# Altium PCB double_amp.PcbDoc
Units mm, origin at the board's own origin, x right, y up, seen from the top; angles counter-clockwise.
Board outline 25 x 21 mm, 2 copper layers (Top Layer, Bottom Layer), stack 0.581 mm thick; 17 components, 11 nets, 135 pads, 86 vias.
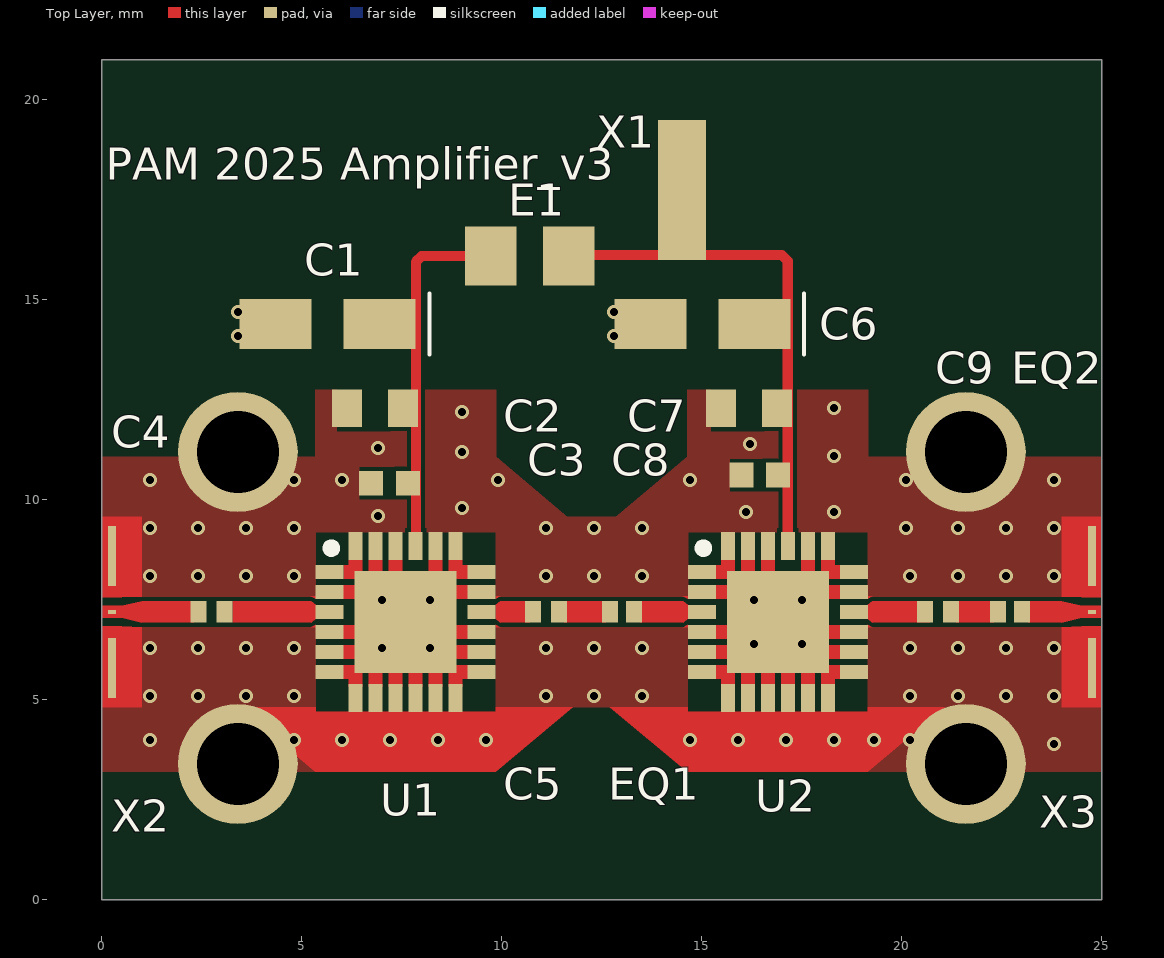
[diagram p0: Top Layer view]
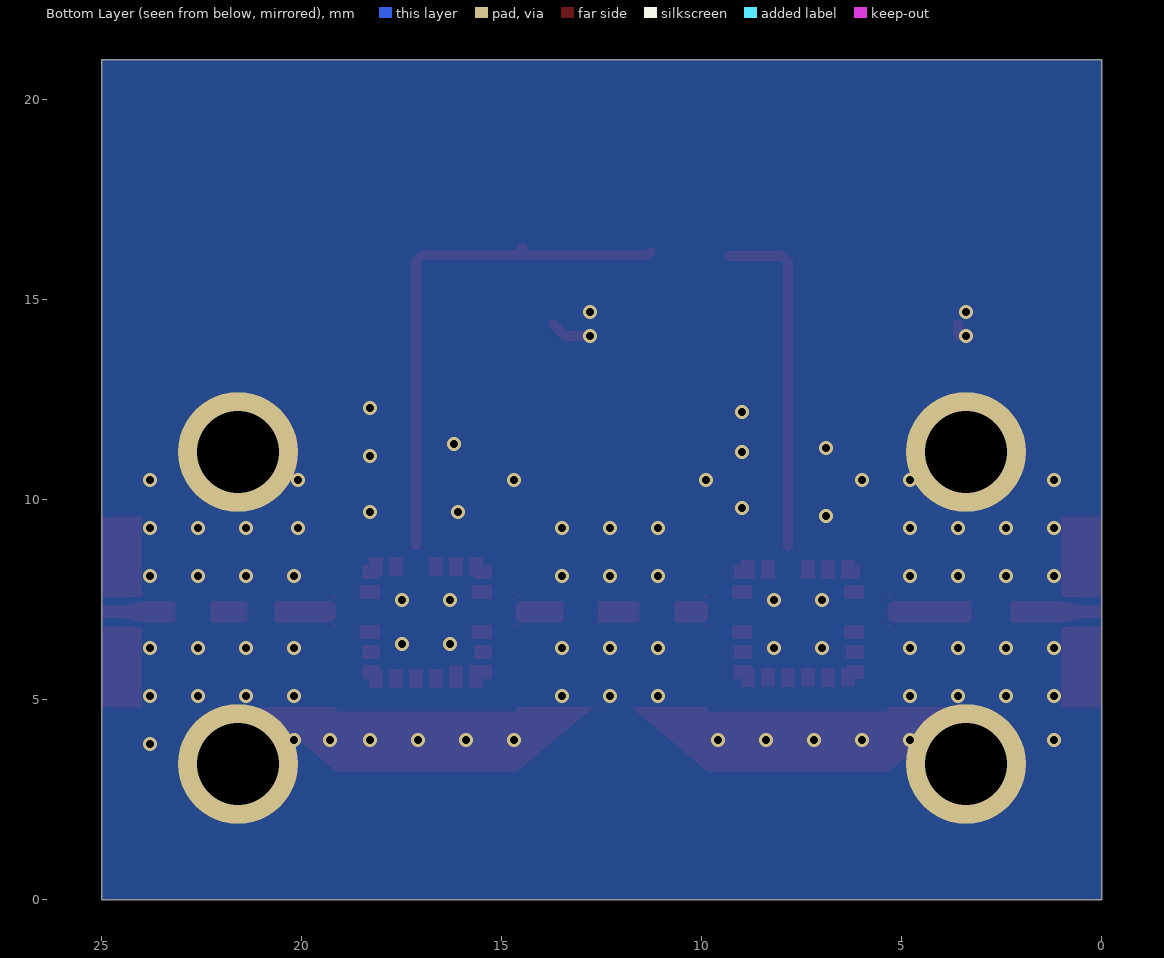
[diagram p1: Bottom Layer view, seen from below]
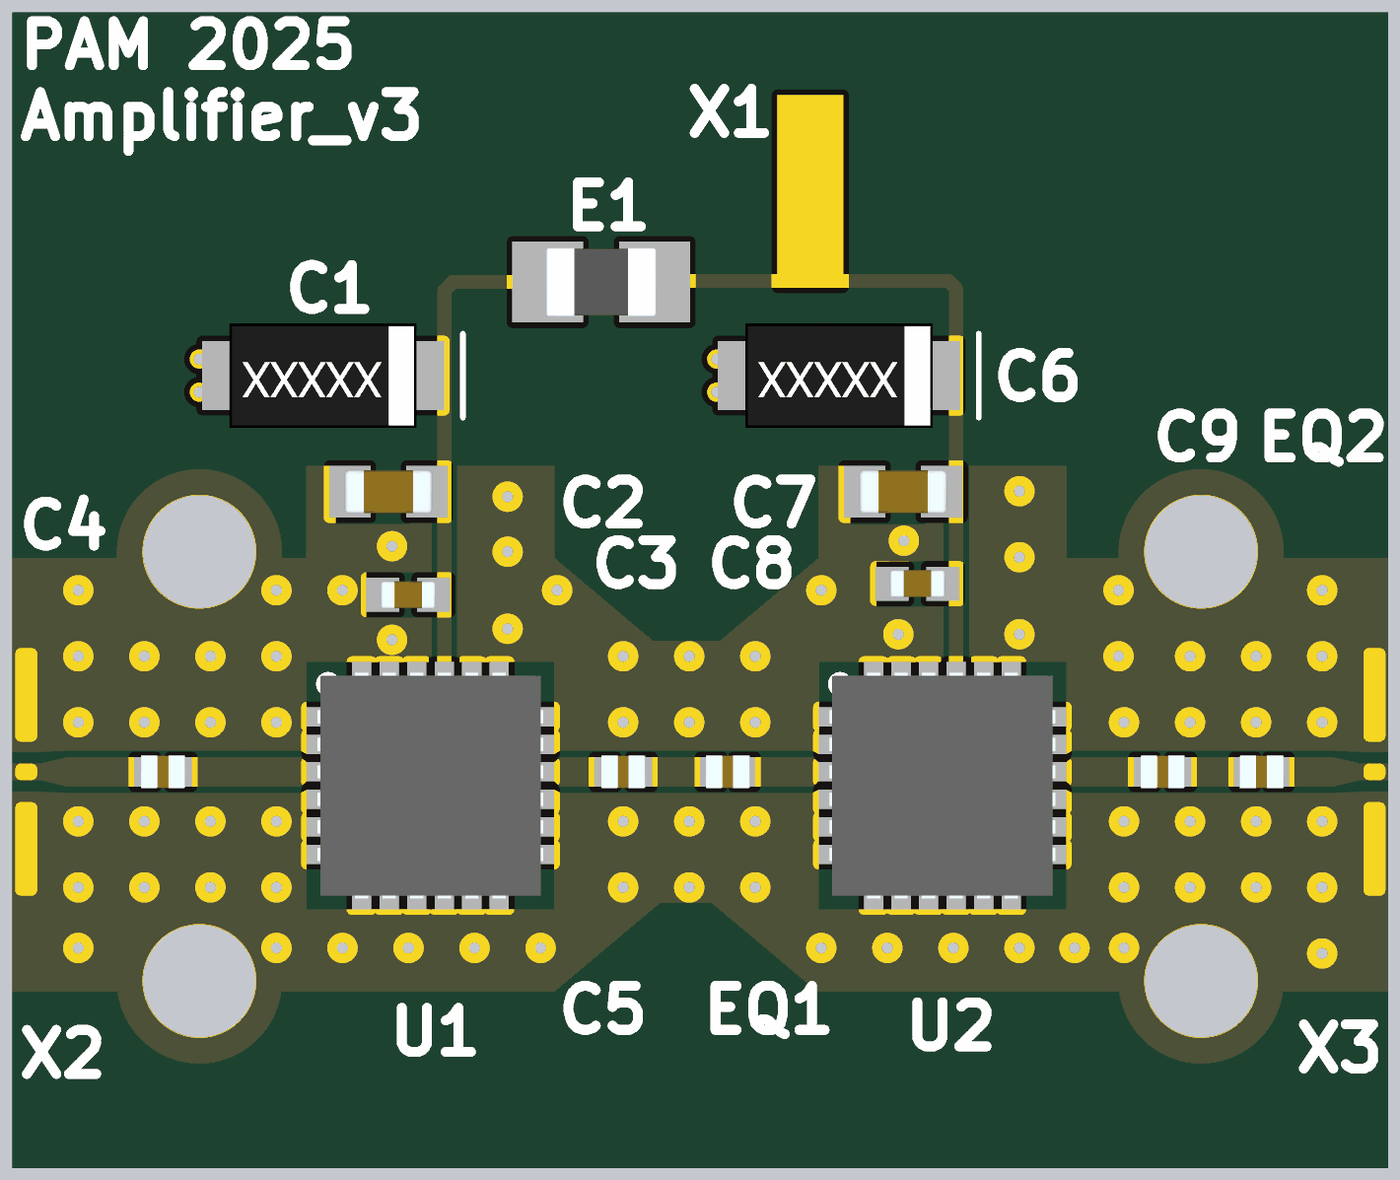
[diagram p2: 3D render of the assembled board from above, using the file's embedded part models]

## Layer stack, top to bottom
Top Layer: signal copper 0.0356
Dielectric 1: dielectric 0.51, Rogers 4350B, Dk 3.48
Bottom Layer: signal copper 0.0356

## Board outline
0,0 0,21 25,21 25,0

## Design rules (kind name [scope] priority, off if disabled: settings)
Clearance "Stitching GND" [IsStitchingVia and InNet('GND') vs (IsVia and (Not IsStitchingVia)) Or IsPad] p1: gap=0 ignorepadtopadclearanceinfootprint=TRUE
Clearance [InNet('GND') vs InNet('+5V B') OR InNet('+5V A')] p2: gap=0.1 ignorepadtopadclearanceinfootprint=FALSE
MinimumSolderMaskSliver [All] p1: minsoldermaskwidth=0
PlaneConnect [InNet('GND')] p1: planeconnectstyle=NoConnect reliefexpansion=0.508 reliefentries=4 reliefconductorwidth=0.254 reliefairgap=0.254
PolygonConnect [InNet('GND') vs InNet('GND')] p1: connectstyle=Direct reliefconductorwidth=0.254 reliefentries=4 polygonreliefangle="90 Angle" airgapwidth=2
RoutingVias [All] p1: holewidth=0.711 width=1.27 viastyle="Through Hole" minholewidth=0.1 minwidth=0.1 maxholewidth=5 maxwidth=5
SilkToSilkClearance [All] p1: silktosilkclearance=0.01
SilkToSolderMaskClearance [IsPad] p1: minsilkscreentomaskgap=0.01 clearancetoexposedcopper=TRUE
SolderMaskExpansion [All] p1: expansion=0.102 istentingtop=FALSE
SupplyNets "Schematic Supply Nets" [InNet('GND')] p1: voltage=0.000
UnpouredPolygon [All] p1: allowunpoured=TRUE
Width [All] p1: maxlimit=0.254 minlimit=0.254 preferedwidth=0.254
25 further rules are at their usual default settings.

## Classes and differential pairs
component class double_amp: C1 C2 C3 C4 C5 C6 C7 C8 C9 E1 EQ2 U1 U2 X1 X2 X3

## Components (designator, comment, footprint, x,y, rotation, side; value= is the part's Value field where it differs from the comment)
C1 "4.7 uF" C4_7uF 5.648,14.4 r180 top value=4.7uF
C2 "1000 pF" C1000pF__C100nF 6.834,12.29 r180 top value=1nF
C3 "100 pF" C100pF 7.191,10.416 r180 top
C4 "10nF" C10nF 2.738,7.2 r0 top
C5 "10nF" C10nF 11.1,7.2 r0 top
C6 "4.7 uF" C4_7uF 15.019,14.4 r180 top value=4.7uF
C7 "1000 pF" C1000pF__C100nF 16.187,12.29 r180 top value=1nF
C8 "100 pF" C100pF 16.447,10.62 r180 top
C9 "10nF" C10nF 20.9,7.2 r0 top
E1 "HZ0805E601R-10" FB_HZ0805E601R-10 10.7,16.1 r0 top
EQ1 "AEQ05472-10" EQ_AEQ05472 13,7.2 r0 top
EQ2 "AEQ05472-10" EQ_AEQ05472 22.7,7.2 r0 top
U1 "MML098GQ4A" amp_MML098GQ4A 7.599,6.95 r0 top
U2 "MML098GQ4A" amp_MML098GQ4A 16.9,6.95 r0 top
X1 "Solder Pad" "Solder Pad" 8.3,19.55 r90 top
X2 "Solder Pad" "CPW Edge Connector" 0.254,7.2 r90 top
X3 "Solder Pad" "CPW Edge Connector" 24.75,7.2 r270 top

## Footprints (in the part's own frame and the unit in brackets; to place one, negate y for a bottom-side part, rotate by r counter-clockwise, add the part's x,y. Pads: shape width x height; smd on the part's side, far side on the other; paste and mask are expansions set on the pad)
amp_MML098GQ4A [mm]
  rect 0.7x0.35 smd: 1(-1.9,1.25) 2(-1.9,0.75) 3(-1.9,0.25) 4(-1.9,-0.25) 5(-1.9,-0.75) 6(-1.9,-1.25) 13(1.9,-1.25) 14(1.9,-0.75) 15(1.9,-0.25) 16(1.9,0.25) 17(1.9,0.75) 18(1.9,1.25)
  rect 0.7x0.35 on Top Paste: 1(-1.9,1.25) 2(-1.9,0.75) 3(-1.9,0.25) 4(-1.9,-0.25) 5(-1.9,-0.75) 6(-1.9,-1.25) 13(1.9,-1.25) 14(1.9,-0.75) 15(1.9,-0.25) 16(1.9,0.25) 17(1.9,0.75) 18(1.9,1.25)
  rect 0.35x0.7 smd: 7(-1.25,-1.9) 8(-0.75,-1.9) 9(-0.25,-1.9) 10(0.25,-1.9) 11(0.75,-1.9) 12(1.25,-1.9) 19(1.25,1.9) 20(0.75,1.9) 21(0.25,1.9) 22(-0.25,1.9) 23(-0.75,1.9) 24(-1.25,1.9)
  rect 0.35x0.7 on Top Paste: 7(-1.25,-1.9) 8(-0.75,-1.9) 9(-0.25,-1.9) 10(0.25,-1.9) 11(0.75,-1.9) 12(1.25,-1.9) 19(1.25,1.9) 20(0.75,1.9) 21(0.25,1.9) 22(-0.25,1.9) 23(-0.75,1.9) 24(-1.25,1.9)
  rect 2.5x2.5 on Top Paste: 25(0,0)
  rect 2.55x2.55 smd: 25(0,0)
  Top Layer region: 1.15,-0.425 1.65,-0.425 1.65,-0.075 1.15,-0.075
  Top Layer region: 1.15,0.575 1.65,0.575 1.65,0.925 1.15,0.925
  Top Layer region: -1.65,-0.425 -1.15,-0.425 -1.15,-0.075 -1.65,-0.075
  Top Layer region: -1.65,0.575 -1.15,0.575 -1.15,0.925 -1.65,0.925
  silkscreen extent -1.96,1.74 -1.76,1.94, body extent -2.05,-2.05 2.05,2.05, height 1.05
C4_7uF [mm]
  rect 1.8x1.25 smd: 1(-1.3,0) 2(1.3,0)
  silkscreen extent -2.54,-0.76 -2.54,0.76, body extent -1.7,-0.95 1.7,0.95, height 1.84
C10nF [mm]
  rect 0.4x0.538 smd: 1(-0.325,0) 2(0.325,0)
  body extent -0.4,-0.3 0.4,0.3, height 0.14
C100pF [mm]
  rect 0.6x0.62 smd: 1(-0.46,0) 2(0.46,0)
  body extent -0.5,-0.25 0.5,0.25, height 0.55
C1000pF__C100nF [mm]
  rect 0.75x0.94 smd: 1(-0.7,0) 2(0.7,0)
  body extent -0.8,-0.4 0.8,0.4, height 0.9
"CPW Edge Connector" [mm]
  rect 0.1x0.2 smd paste-2539.97: 1(0,0)
  rect 1.5x0.2 smd paste-2539.97: 2(-1.4,0) 3(1.4,0)
  Top Layer region: 2.383,0.25 0.361,0.25 0.361,-0.25 0.383,-0.75 2.383,-0.75
  Top Layer region: -0.15,0.25 0.15,0.25 0.15,-0.25 0.269,-0.75 -0.269,-0.75 -0.15,-0.25
  Top Layer region: -2.383,0.25 -0.361,0.25 -0.361,-0.25 -0.383,-0.75 -2.383,-0.75
EQ_AEQ05472 [mm]
  rect 0.4x0.538 smd: 1(-0.3,0) 2(0.3,0)
  body extent -0.4,-0.3 0.4,0.3, height 0.14
FB_HZ0805E601R-10 [mm]
  rect 1.285x1.47 smd: 1(-0.973,0) 2(0.973,0)
  body extent -1,-0.63 1,0.63, height 1.1
"Solder Pad" [mm]
  rect 3.5x1.2 smd paste-2539.97: 1(-1.8,-6.2)

## Part data
C1 C6: library part C7_4uF_TH3A475K010C2900, "Tantalum Capacitor, Polarized, Tantalum (dry/solid), 10V, 10% +Tol, 10% -Tol, 4.7uF, Surface Mount, 1306", Capacitor Type=Tantalum, Case/Package=1206, ESR (Equivalent Series Resistance)=2.9R, Leakage Current=500nA, Manufacturer="Vishay Sprague", Manufacturer Part Number=TH3A475K010C2900, Max Operating Temperature=150°C, Min Operating Temperature=-55°C, Package Shape=Rectangular, Package Style=SMTMeter, Rated DC Voltage (URdc)=10V, Ripple Current=160mA, Supplier Part Number=4924098, Tolerance  (fill in as +-)=10%, Category="Tantalum Capacitors", ComponentLink1Description=https://datasheet.ciiva.com:443/pdfs/VipMasterIC/IC/VISH/VISH-S-A0010085390/VISH-S-A0010085390-1.pdf?src-supplier=IHS+Markit, ComponentLink1URL=https://datasheet.ciiva.com:443/pdfs/VipMasterIC/IC/VISH/VISH-S-A0010085390/VISH-S-A0010085390-1.pdf?src-supplier=IHS+Markit, ComponentLink2Description=https://datasheet.ciiva.com/268/th3-268785.pdf?src-supplier=Digikey, ComponentLink2URL=https://datasheet.ciiva.com/268/th3-268785.pdf?src-supplier=Digikey, ComponentLink3Description=https://datasheet.ciiva.com/16360/th3-16360891.pdf?src-supplier=Future+Electronics, ComponentLink3URL=https://datasheet.ciiva.com/16360/th3-16360891.pdf?src-supplier=Future+Electronics, Dielectric Material=Tantalum, Height=1.6mm, JESD-609 Code=e3, Length=3.2mm, Mounting Technology="Surface Mount", Packaging="Tape and Reel", Pins=2, Polarity=Polarized, Pricing="2000=0.178, 4000=0.175, 6000=0.173, 8000=0.171, 10000=0.166 (USD)", Reach SVHC Compliant=Yes, Reference Standard=AEC-Q200, RoHS=Yes, RoHS Compliant=Yes, Stock=2000, Supplier="Future Electronics", Tan Delta=0.06, Terminal Finish=Tin, Termination="J BEND", Tolerance (fill in as +-)=10%, Width=1.6mm
C2 C7: library part C1000pF_GCM1885C1H102FA16D, "Ceramic Capacitor, Multilayer, Ceramic, 50V, 1% +Tol, 1% -Tol, C0G, 30ppm/Cel TC, 0.001uF, Surface Mount, 0603", Capacitor Type=Ceramic, Case/Package=0603, Manufacturer=Murata, Manufacturer Part Number=GCM1885C1H102FA16D, Max Operating Temperature=125°C, Min Operating Temperature=-55°C, Package Shape=Rectangular, Rated DC Voltage (URdc)=50V, Supplier Part Number=81-GCM1885C1H102FA6D, Temperature Characteristics Code=C0G, Tolerance  (fill in as +-)=1%, Category="Ceramic Capacitors", ComponentLink1Description=https://datasheet.ciiva.com:443/pdfs/VipMasterIC/IC/MURE/MURE-S-A0004370842/MURE-S-A0004372260-1.pdf?src-supplier=IHS+Markit, ComponentLink1URL=https://datasheet.ciiva.com:443/pdfs/VipMasterIC/IC/MURE/MURE-S-A0004370842/MURE-S-A0004372260-1.pdf?src-supplier=IHS+Markit, Dielectric Material=Ceramic, Mounting Technology="Surface Mount", Multilayer=Yes, Packaging="Tape and Reel", Pins=2, Pricing="1=0.35, 10=0.229, 50=0.229, 100=0.138, 1000=0.092, 10000=0.074 (USD)", Reach SVHC Compliant=Yes, Reference Standard=AEC-Q200, RoHS=Yes, RoHS Compliant=Yes, Stock=27229, Supplier=Mouser, Termination=Wraparound, Tolerance (fill in as +-)=1%
C3 C8: library part C100pF_GRM1555C2A101FA01D, "Multilayer Ceramic Capacitors MLCC - SMD/SMT 100 pF 100 VDC 1% 0402 C0G (NP0)", Manufacturer=Murata, Manufacturer Part Number=GRM1555C2A101FA01D, Supplier Part Number=81-GRM1555C2A11FA1D, Pricing="1=0.18, 10=0.119, 50=0.119, 100=0.06, 1000=0.039, 10000=0.035 (USD)", RoHS=No, Stock=21646, Supplier=Mouser
C4 C5 C9: library part C10nF_939113733510, Manufacturer=Murata, Manufacturer Part Number=939113733510, Supplier Part Number=961-939113733510, Pricing="1000=3.63, 10000=3.49 (USD)", RoHS=No, Stock=402, Supplier=Mouser
E1: "Ferrite Bead (Chip Bead), 2 x 1.25 x 1.25mm (0805), 277Ohms impedance at 25 MHz", Package="0805 Laird", Check_prices=https://www.snapeda.com/parts/HZ0805E601R-10/Laird-Signal+Integrity+Products/view-part/?ref=eda, MF="Laird-Signal Integrity Products", MP=HZ0805E601R-10, SnapEDA_Link=https://www.snapeda.com/parts/HZ0805E601R-10/Laird-Signal+Integrity+Products/view-part/?ref=snap
EQ1 EQ2: library part EQ_AEQ05472-10, "Rf Filter Gain Equalizer 2SMD", Manufacturer="Knowles Dielectric Labs", Supplier Part Number=1761-1006-ND, ComponentLink1Description=http://www.mouser.com/ds/2/110/Dielectriclaboratories_EW_Series-340573.pdf?src-supplier=Mouser, ComponentLink1URL=http://www.mouser.com/ds/2/110/Dielectriclaboratories_EW_Series-340573.pdf?src-supplier=Mouser, ComponentLink2Description=http://www.knowlescapacitors.com/getattachment/69df7735-7ed2-4c4f-903b-a99acda4fa2d/Gain-Equalizers.aspx?src-supplier=Digikey, ComponentLink2URL=http://www.knowlescapacitors.com/getattachment/69df7735-7ed2-4c4f-903b-a99acda4fa2d/Gain-Equalizers.aspx?src-supplier=Digikey, Manufacturer Part Number=AEQ05472-10, Pricing="10=7.145, 20=6.5195, 30=6.203, 50=5.8498, 70=5.64214, 100=5.4415, 250=5.00556, 500=4.7401, 1000=4.51981 (USD)", RoHS=Yes, Stock=390, Supplier=Digikey
U1 U2: library part amp_MML098GQ4A, "Low Noise Amplifier / Low current consumption / Low noise figure / Pb-free RoHS compliant QFN package / Ultra wideband performance / Positive bias / Ready for Space Qualification", Current (mA)=57, Frequency (GHz)=0.05-20.00, Voltage (VDC)=5.0, Gain (dB)=23.00, Manufacturer Part Number=MML098GQ4A, Noise Figure (dB)=2.3, Output P1dB (dBm)=12.00
X1: "Pad to solder wires to"
X2 X3: library part "RF  CPW Solder Pad", "Solder pad for RF Coplanar Waveguide Rogers 4350B Thickness 0.020\" Copper 1oz"

## Free pads (board coordinates)
  round 3 hole 2.05 mask-2539.97: 1(3.4,3.4) 1(3.4,11.2) 1(21.6,3.4) 1(21.6,11.2)

## Via types
v1: diameter 0.35, hole 0.2, Top Layer to Bottom Layer, 86 vias

## Nets (pads, with @x,y where several pads share a name; then routed paths per layer and width w, separated by ;. In a path a pad name is that pad's centre, name@x,y a point inside that pad or via, vN(x,y) a via of type N, cw(c..) or ccw(c..) an arc to the next point about the centre after c; other vN are vias at no path point)
"+5V A": C6.1 C7.1 C8.1 E1.2 U2.21@17.15,8.85 X1.1 | length 13.3
  Top Layer w0.254: E1.2@11.273,16.2 11.352,16.121 X1.1@14.5,16.121 ; X1.1@14.5,16.3 X1.1@14.5,16.121 ; U2.21@17.15,8.847 17.15,8.85 17.15,14.4 17.15,15.973 17.001,16.121 X1.1@14.5,16.121
"+5V B": C1.1 C2.1 C3.1 E1.1 U1.21@7.849,8.85 | length 8.6
  Top Layer w0.254: U1.21@7.852,8.854 7.852,10.416 7.852,15.951 8.001,16.1 E1.1@9.327,16.1
C4: C4.2 U1.3@5.699,7.2
C9: C9.2 EQ2.1
GND: C1.2 C2.2 C3.2 C6.2 C7.2 C8.2 pad.1 U1.1@5.699,8.2 U1.2@5.699,7.7 U1.4@5.699,6.7 U1.5@5.699,6.2 U1.6@5.699,5.7 U1.7@6.349,5.05 U1.8@6.849,5.05 U1.9@7.349,5.05 U1.10@7.849,5.05 U1.11@8.349,5.05 U1.12@8.849,5.05 U1.13@9.499,5.7 U1.14@9.499,6.2 U1.15@9.499,6.7 U1.17@9.499,7.7 U1.18@9.499,8.2 U1.19@8.849,8.85 U1.20@8.349,8.85 U1.22@7.349,8.85 U1.23@6.849,8.85 U1.24@6.349,8.85 U1.25@7.599,6.95 U2.1@15,8.2 U2.2@15,7.7 U2.4@15,6.7 U2.5@15,6.2 U2.6@15,5.7 U2.7@15.65,5.05 U2.8@16.15,5.05 U2.9@16.65,5.05 U2.10@17.15,5.05 U2.11@17.65,5.05 U2.12@18.15,5.05 U2.13@18.8,5.7 U2.14@18.8,6.2 U2.15@18.8,6.7 U2.17@18.8,7.7 U2.18@18.8,8.2 U2.19@18.15,8.85 U2.20@17.65,8.85 U2.22@16.65,8.85 U2.23@16.15,8.85 U2.24@15.65,8.85 U2.25@16.9,6.95 X2.2 X2.3 X3.2 X3.3 | length 1.5
  Top Layer w0.254: v1(3.4,14.1) 3.575,14.1 3.6,14.125 C1.2@3.6,14.4 ; v1(12.8,14.1) 13.419,14.1 C6.2
  other v1: 23.8,3.9 1.2,4 4.8,4 6,4 7.2,4 8.4,4 9.6,4 14.7,4 15.9,4 17.1,4 18.3,4 19.3,4 20.2,4 1.2,5.1 2.4,5.1 3.6,5.1 4.8,5.1 11.1,5.1 12.3,5.1 13.5,5.1 20.2,5.1 21.4,5.1 22.6,5.1 23.8,5.1 1.2,6.3 2.4,6.3 3.6,6.3 4.8,6.3 7,6.3 8.2,6.3 11.1,6.3 12.3,6.3 13.5,6.3 20.2,6.3 21.4,6.3 22.6,6.3 23.8,6.3 16.3,6.4 17.5,6.4 7,7.5 8.2,7.5 16.3,7.5 17.5,7.5 1.2,8.1 2.4,8.1 3.6,8.1 4.8,8.1 11.1,8.1 12.3,8.1 13.5,8.1 20.2,8.1 21.4,8.1 22.6,8.1 23.8,8.1 1.2,9.3 2.4,9.3 3.6,9.3 4.8,9.3 11.1,9.3 12.3,9.3 13.5,9.3 20.1,9.3 21.4,9.3 22.6,9.3 23.8,9.3 6.9,9.6 16.1,9.7 18.3,9.7 9,9.8 1.2,10.5 4.8,10.5 6,10.5 9.9,10.5 14.7,10.5 20.1,10.5 23.8,10.5 18.3,11.1 9,11.2 6.9,11.3 16.2,11.4 9,12.2 18.3,12.3 3.4,14.7 12.8,14.7
NetC5_1: C5.1 U1.16@9.499,7.2
NetC5_2: C5.2 EQ1.1
NetC9_1: C9.1 U2.16@18.8,7.2
NetEQ1_2: EQ1.2 U2.3@15,7.2
RFin: C4.1 X2.1
RFout: EQ2.2 X3.1
pads on no net: U1.1@5.699,8.2 U1.2@5.699,7.7 U1.3@5.699,7.2 U1.4@5.699,6.7 U1.5@5.699,6.2 U1.6@5.699,5.7 U1.7@6.349,5.05 U1.8@6.849,5.05 U1.9@7.349,5.05 U1.10@7.849,5.05 U1.11@8.349,5.05 U1.12@8.849,5.05 U1.13@9.499,5.7 U1.14@9.499,6.2 U1.15@9.499,6.7 U1.16@9.499,7.2 U1.17@9.499,7.7 U1.18@9.499,8.2 U1.19@8.849,8.85 U1.20@8.349,8.85 U1.21@7.849,8.85 U1.22@7.349,8.85 U1.23@6.849,8.85 U1.24@6.349,8.85 U1.25@7.599,6.95 U2.1@15,8.2 U2.2@15,7.7 U2.3@15,7.2 U2.4@15,6.7 U2.5@15,6.2 U2.6@15,5.7 U2.7@15.65,5.05 U2.8@16.15,5.05 U2.9@16.65,5.05 U2.10@17.15,5.05 U2.11@17.65,5.05 U2.12@18.15,5.05 U2.13@18.8,5.7 U2.14@18.8,6.2 U2.15@18.8,6.7 U2.16@18.8,7.2 U2.17@18.8,7.7 U2.18@18.8,8.2 U2.19@18.15,8.85 U2.20@17.65,8.85 U2.21@17.15,8.85 U2.22@16.65,8.85 U2.23@16.15,8.85 U2.24@15.65,8.85 U2.25@16.9,6.95

## Polygon pours and split planes (outlines as drawn)
GND on Top Layer "GND_L01_P008" (solid, pour order 8): 5.341,12.759 9.857,12.759 9.857,11.082 12.1,9.196 3.093,9.196 5.341,11.082
GND on Top Layer "GND_L01_P009" (solid, pour order 9): 14.643,12.758 19.159,12.758 19.159,11.082 21.403,9.195 12.396,9.195 14.643,11.082
GND on Top Layer "GND_L01_P000" (solid, remove dead copper, pour order 0): 0,11.083 0,7.583 5.351,7.583 5.341,11.083
GND on Top Layer "GND_L01_P002" (solid, remove dead copper, pour order 2): 0,6.817 0,3.202 5.352,3.202 5.352,6.817
GND on Top Layer "GND_L01_P007" (solid, remove dead copper, pour order 7): 19.146,11.083 19.146,7.583 25,7.583 25,11.083
GND on Top Layer "GND_L01_P006" (solid, remove dead copper, pour order 6): 19.148,6.817 19.148,3.201 25,3.201 25,6.817
GND on Top Layer "GND_L01_P005" (solid, remove dead copper, pour order 5): 9.849,6.817 9.849,4.817 14.65,4.817 14.65,6.817
GND on Top Layer "GND_L01_P004" (solid, remove dead copper, pour order 4): 9.844,9.583 9.844,7.583 14.66,7.583 14.66,9.583
GND on Bottom Layer "GND_L02_P012" (solid, pour order 12): 0,21 0,0 25,0 25,21

## Other copper
Top Layer:
  rectangle net NetC5_1: 9.959,6.931 10.7,7.469
  rectangle net NetEQ1_2: 13.459,6.931 14.54,7.469
  rectangle net NetC5_2: 11.559,6.931 12.6,7.469
  rectangle net GND: 18.048,8.025 18.5,8.375
  rectangle net GND: 18.048,6.025 18.5,6.375
  rectangle net GND: 18.048,5.525 18.5,5.875
  rectangle net GND: 15.248,5.525 15.7,5.875
  rectangle net GND: 15.248,6.025 15.7,6.375
  rectangle net GND: 15.248,8.025 15.7,8.375
  rectangle net GND: 17.975,8.1 18.325,8.574
  rectangle net GND: 17.475,8.1 17.825,8.574
  rectangle net GND: 16.475,8.1 16.825,8.574
  rectangle net GND: 15.975,8.1 16.325,8.574
  rectangle net GND: 15.475,8.1 15.825,8.574
  rectangle net GND: 17.975,5.3 18.325,5.774
  rectangle net GND: 17.475,5.3 17.825,5.774
  rectangle net GND: 16.975,5.3 17.325,5.774
  rectangle net GND: 16.475,5.3 16.825,5.774
  rectangle net GND: 15.975,5.3 16.325,5.874
  rectangle net GND: 15.475,5.3 15.825,5.874
  rectangle net GND: 8.674,5.327 9.024,5.801
  rectangle net GND: 8.748,8.025 9.2,8.375
  rectangle net GND: 8.748,6.025 9.2,6.375
  rectangle net GND: 8.748,5.525 9.2,5.875
  rectangle net GND: 5.948,5.525 6.4,5.875
  rectangle net GND: 5.948,6.025 6.4,6.375
  rectangle net GND: 8.174,5.327 8.524,5.801
  rectangle net GND: 7.674,5.327 8.024,5.801
  rectangle net GND: 7.174,5.327 7.524,5.801
  rectangle net GND: 6.674,5.327 7.024,5.801
  rectangle net GND: 6.174,5.327 6.524,5.801
  rectangle net GND: 8.674,8.027 9.024,8.501
  rectangle net GND: 8.174,8.027 8.524,8.501
  rectangle net GND: 7.174,8.027 7.524,8.501
  rectangle net GND: 6.674,8.027 7.024,8.501
  rectangle net GND: 6.048,8.025 6.5,8.375
  rectangle net GND: 6.174,8.027 6.524,8.501
  rectangle net RFout: 23.159,6.931 24.001,7.469
  rectangle net C9: 21.359,6.931 22.3,7.469
  rectangle net NetC9_1: 19.259,6.931 20.7,7.469
  rectangle net C4: 3.263,6.931 5.239,7.469
  rectangle net RFin: 1,6.932 2.3,7.47
  region net GND: 19.15,6.875 19.268,6.814 19.15,6.814
  region net GND: 9.849,6.875 9.967,6.814 9.849,6.814
  region net GND: 19.15,7.525 19.268,7.587 19.15,7.587
  region net GND: 9.848,7.525 9.966,7.587 9.848,7.587
  region net GND: 14.65,6.875 14.532,6.814 14.65,6.814
  region net GND: 14.65,7.525 14.531,7.587 14.65,7.587
  region net NetC9_1: 19.26,7.469 19.15,7.375 19.15,7.025 19.26,6.931
  region net NetEQ1_2: 14.54,7.469 14.65,7.375 14.65,7.025 14.54,6.931
  region net GND: 5.349,6.875 5.231,6.814 5.349,6.814
  pour cut-out: 5.874,12.846 7.228,12.846 7.228,11.706 5.874,11.706
  pour cut-out: 7.313,10.006 6.434,10.006 6.434,10.826 7.313,10.826
  region net C4: 5.239,7.469 5.349,7.375 5.349,7.025 5.239,6.931
  region net GND: 5.349,7.525 5.229,7.587 5.349,7.587
  region net GND: 3.407,4.818 5.351,4.818 5.351,4.702 9.849,4.702 9.849,4.818 11.772,4.818 9.849,3.202 5.333,3.202
  pour cut-out: 16.58,10.203 15.701,10.203 15.701,11.023 16.58,11.023
  pour cut-out: 15.223,12.84 16.577,12.84 16.577,11.7 15.223,11.7
  region net GND: 12.706,4.817 14.65,4.817 14.65,4.701 19.148,4.701 19.148,4.817 21.071,4.817 19.148,3.201 14.632,3.201
  region net NetC5_1: 9.959,7.469 9.848,7.375 9.848,7.025 9.959,6.931
Multi-Layer:
  pour cut-out: 0,21 25,21 25,0 0,0

## Silkscreen, mask and mechanical layers (free items; w line width, h text height)
Top Overlay:
  text "PAM 2025 Amplifier_v3" at 0.1,18 h0.8
Board:
  the board outline again, w0.1
Board (Mech4):
  the board outline again, w0.1